# EAGLE board Armduino v14 (EAGLE 7.1.0)
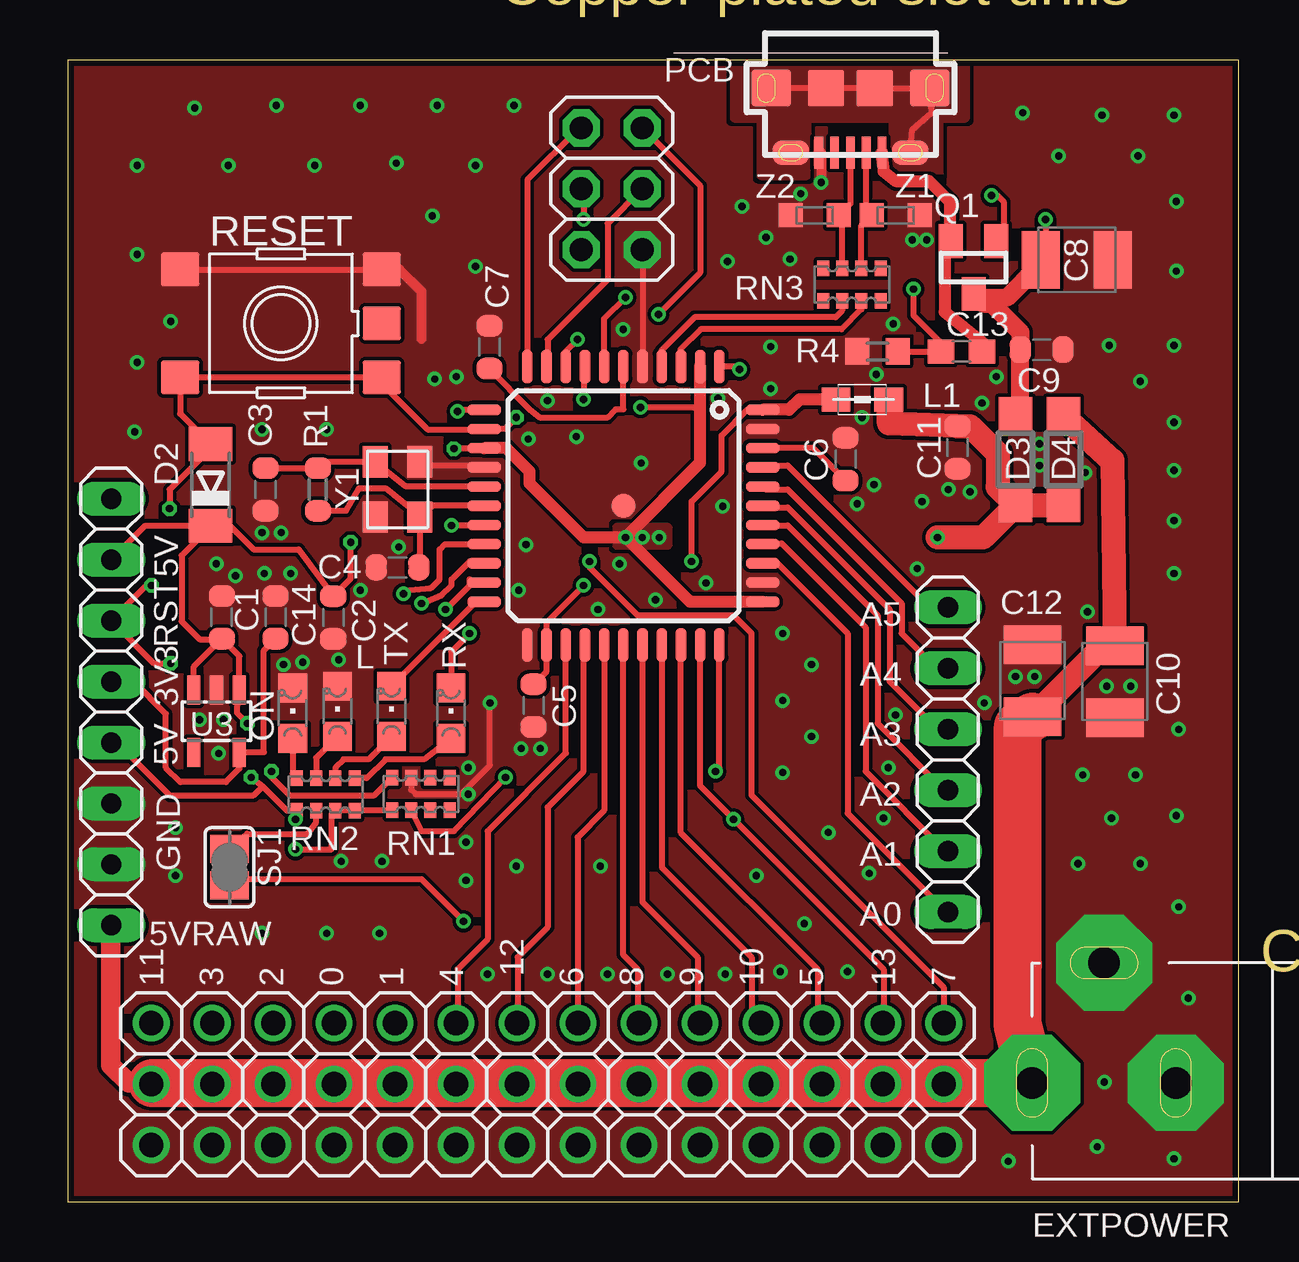
[diagram p0: board, top side]
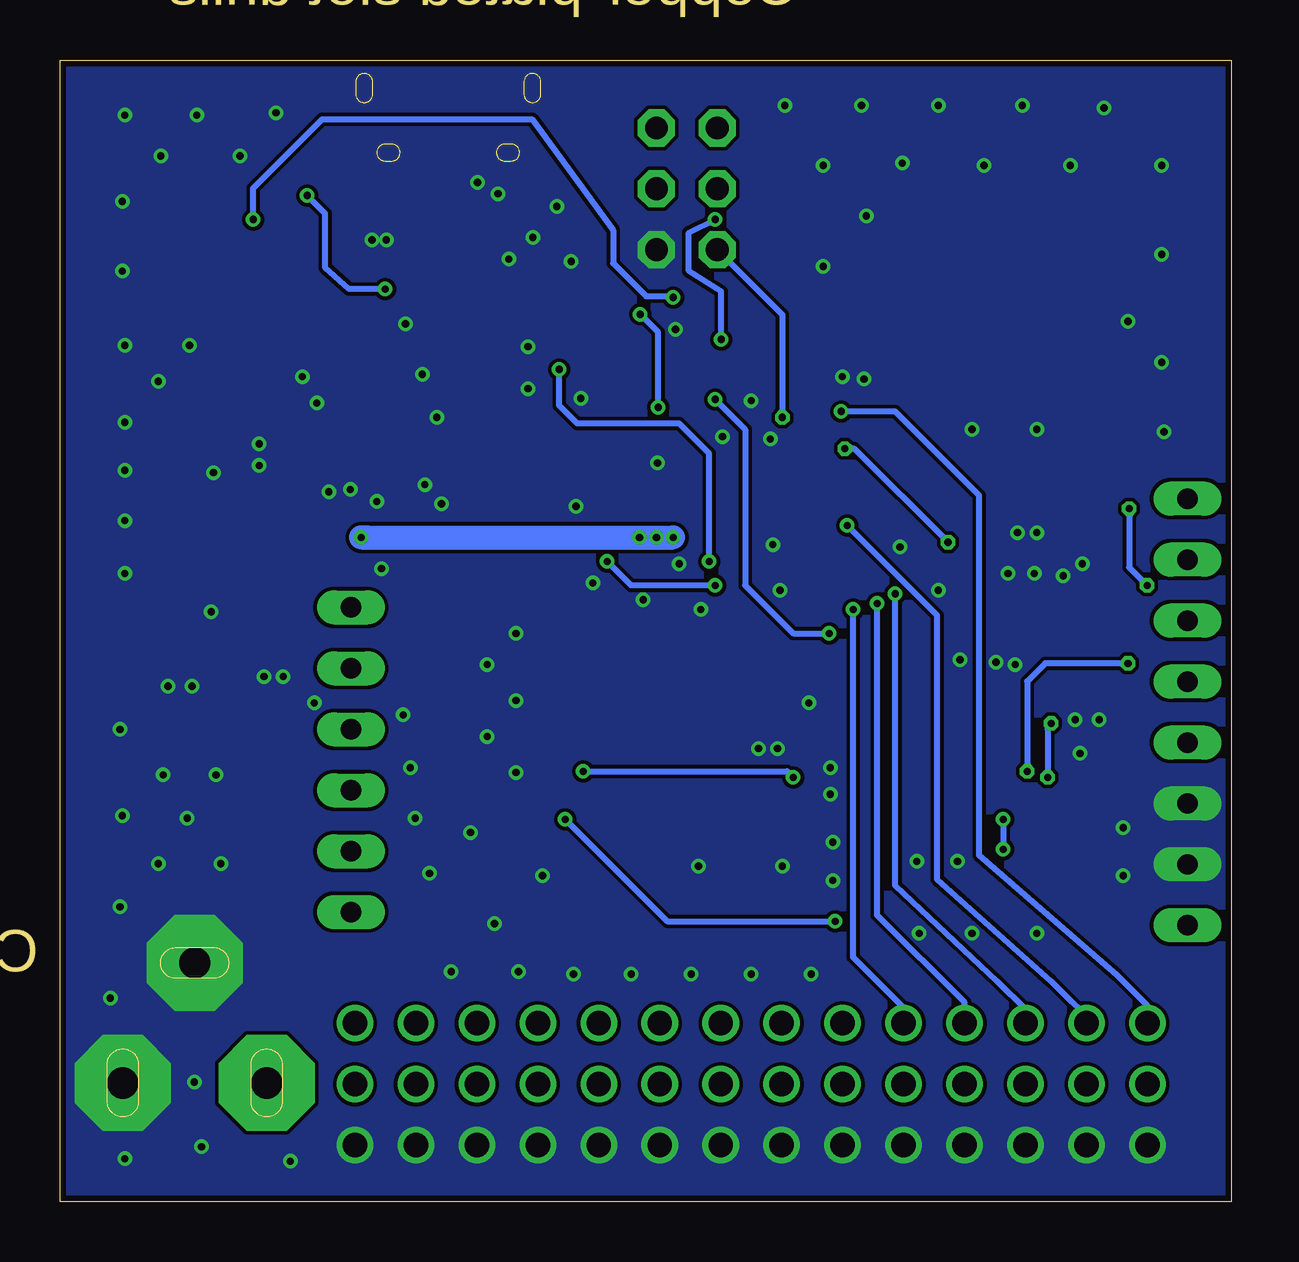
[diagram p1: board, bottom side, seen from below]

Size 48.8 x 47.6 mm. Coordinates in mm from the lower left corner, seen from the top.
Outline: 0,0 48.8,0 48.8,47.6 0,47.6 0,0
Copper layers (1*16): Top 0.035mm / dielectric 1.5mm / Bottom 0.035mm
Design rules "SeeedStudio_DRU_no_angle_2layer *": minimum track width 6mil, minimum drill 0.3mm, track to track 6mil, track to pad 6mil, pad to pad 6mil, via to via 6mil, smd to smd 0mil, copper to edge 10mil, drill to drill 10mil, minimum pad ring 10mil, minimum via ring 6mil, stop-mask expansion 2mil, vias tented up to drill 25mil, thermal gap 10mil
Net classes: 0 default: width 0.152 mm, drill 0.3 mm, clearance 0.152 mm; 1 power: width 0.152 mm, drill 0.3 mm, clearance 0.152 mm; 2 gnd: width 0.152 mm, drill 0.3 mm, clearance 0.152 mm; 3 usbvcc: width 0.152 mm, drill 0.3 mm, clearance 0.152 mm; 4 aref: width 0.152 mm, drill 0.3 mm, clearance 0.152 mm

## Footprints (pad centres in the part's own frame; a part is rotated, then mirrored left to right if it is on the bottom)
C0603-ROUND = smd 0.898 x 1.1: 1 -0.889,0; 2 0.889,0
SMC_B = smd 1.6 x 2.4: + -1.5,0; - 1.5,0
C0603 = smd 1.1 x 1: 1 -0.85,0; 2 0.85,0
MINIMELF = smd 1.4 x 1.8: A 1.7,0; C -1.7,0
SOD123 = smd 1.4 x 1.4: A 1.9,0; C -1.9,0
SMARTPRJ_POWERSUPPLY_DC-21MM = drill 1.3 pad 4 octagon: 1 -5.08,-3.353; 2 -0.076,-6.35; 3 -0.076,-0.356
2X03 = drill 0.95 pad 1.55 octagon: 1 -2.54,-1.27; 2 -2.54,1.27; 3 0,-1.27; 4 0,1.27; 5 2.54,-1.27; 6 2.54,1.27
SMARTPRJ_CON2_USB_MICRO_B_AT = smd 0.406 x 1.346: P1 -1.321,2.692; P2 -0.66,2.692; P3 0,2.692; P4 0.66,2.692; P5 1.321,2.692 | smd 1.651 x 1.549: S1 -3.302,0; S2 3.302,0 | smd 1.524 x 1.016: S3 -2.489,2.692; S4 2.489,2.692 | smd 1.524 x 1.524: S5 -1.016,0; S6 1.016,0
1X08 = drill 0.85 pad 1.422 long: 1 -8.89,0; 2 -6.35,0; 3 -3.81,0; 4 -1.27,0; 5 1.27,0; 6 3.81,0; 7 6.35,0; 8 8.89,0
1X06 = drill 0.85 pad 1.422 long: 1 -6.35,0; 2 -3.81,0; 3 -1.27,0; 4 1.27,0; 5 3.81,0; 6 6.35,0
1X14ROUND = drill 1.016: 1 -16.51,0; 2 -13.97,0; 3 -11.43,0; 4 -8.89,0; 5 -6.35,0; 6 -3.81,0; 7 -1.27,0; 8 1.27,0; 9 3.81,0; 10 6.35,0; 11 8.89,0; 12 11.43,0; 13 13.97,0; 14 16.51,0
CHIPLED_0805 = smd 1.2 x 1.2: A 0,-1.05; C 0,1.05
0805 = smd 1.2 x 1: 1 -1.1,0; 2 1.1,0
SUPER-SOT3 = smd 1 x 1.4: 1 -0.95,-1.1; 2 0.95,-1.1; 3 0,1.1
R0603-ROUND = smd 0.898 x 1.1: 1 -0.889,0; 2 0.889,0
R0603 = smd 1 x 1.1: 1 -0.85,0; 2 0.85,0
TS42 = smd 1.6 x 1.4: 1 -4.2,2.25; 2 4.2,2.25; 3 -4.2,-2.25; 4 4.2,-2.25; 5 -4.2,0
CAY16 = smd 0.5 x 0.65: 1 -1.2,-0.675; 2 -0.4,-0.675; 3 0.4,-0.675; 4 1.2,-0.675; 5 1.2,0.675; 6 0.4,0.675; 7 -0.4,0.675; 8 -1.2,0.675
SJ = smd 1.168 x 1.6: 1 -0.762,0; 2 0.762,0
TQFP44-PAD = smd 1.4 x 0.45: 1 -5.8,4; 2 -5.8,3.2; 3 -5.8,2.4; 4 -5.8,1.6; 5 -5.8,0.8; 6 -5.8,0; 7 -5.8,-0.8; 8 -5.8,-1.6; 9 -5.8,-2.4; 10 -5.8,-3.2; 11 -5.8,-4; 23 5.8,-4; 24 5.8,-3.2; 25 5.8,-2.4; 26 5.8,-1.6; 27 5.8,-0.8; 28 5.8,0; 29 5.8,0.8; 30 5.8,1.6; 31 5.8,2.4; 32 5.8,3.2; 33 5.8,4 | smd 0.45 x 1.4: 12 -4,-5.8; 13 -3.2,-5.8; 14 -2.4,-5.8; 15 -1.6,-5.8; 16 -0.8,-5.8; 17 0,-5.8; 18 0.8,-5.8; 19 1.6,-5.8; 20 2.4,-5.8; 21 3.2,-5.8; 22 4,-5.8; 34 4,5.8; 35 3.2,5.8; 36 2.4,5.8; 37 1.6,5.8; 38 0.8,5.8; 39 0,5.8; 40 -0.8,5.8; 41 -1.6,5.8; 42 -2.4,5.8; 43 -3.2,5.8; 44 -4,5.8 | smd 1 x 1: P$1 0,0
SOT23-DBV = smd 0.55 x 1.2: 1 -0.95,-1.3; 2 0,-1.3; 3 0.95,-1.3; 4 0.95,1.3; 5 -0.95,1.3
CRYSTAL-3.2-2.5 = smd 1.3 x 1.05: 1 -1.15,-0.925; 2 1.15,-0.925; 3 1.15,0.925; 4 -1.15,0.925
CT/CN0603 = smd 1 x 1: 1 -1,0; 2 1,0

## Placement (x,y rotation side)
C1  100n  [C0603-ROUND]  6.43,24.37 90 top
C2  100n  [C0603-ROUND]  11.07,24.36 270 top
C3  22p  [C0603-ROUND]  8.25,29.7 90 top
C4  22p  [C0603-ROUND]  13.75,26.45 180 top
C5  1uF  [C0603-ROUND]  19.42,20.69 270 top
C6  100n  [C0603-ROUND]  32.42,30.96 270 top
C7  1uF  [C0603-ROUND]  17.58,35.63 90 top
C8  10u  [SMC_B]  42.05,39.27 0 top
C9  100n  [C0603-ROUND]  40.59,35.53 180 top
C10  10u  [SMC_B]  43.64,21.69 270 top
C11  1u  [C0603-ROUND]  37.08,31.45 90 top
C12  10u  [SMC_B]  40.21,21.73 90 top
C13  100n  [C0603]  37.25,35.45 0 top
C14  1u  [C0603-ROUND]  8.67,24.37 270 top
D2  CD1206-S01575  [MINIMELF]  5.96,29.89 90 top
D3  [SOD123]  39.5,30.95 90 top
D4  [SOD123]  41.5,30.95 90 top
EXTPOWER  SMARTPRJ_POWERSUPPLY_DC21MMX  [SMARTPRJ_POWERSUPPLY_DC-21MM]  46.54,4.88 270 top
ICSP  ICSP  [2X03]  22.68,42.23 270 top
J1  USB MICRO  [SMARTPRJ_CON2_USB_MICRO_B_AT]  32.62,46.43 180 top
J3  8x1F-H8.5  [1X08]  1.82,20.42 270 top
J4  6x1F-H8.5  [1X06]  36.68,18.43 90 top
JP1  [1X14ROUND]  20,2.37 0 top
JP2  [1X14ROUND]  20,7.45 0 top
JP3  [1X14ROUND]  20,4.91 0 top
L  Yellow  [CHIPLED_0805]  11.25,20.45 0 top
L1  MH2029-300Y  [0805]  33.12,33.45 180 top
ON  Green  [CHIPLED_0805]  9.38,20.37 0 top
Q1  FDN360P  [SUPER-SOT3]  37.75,38.95 180 top
R1  1M  [R0603-ROUND]  10.43,29.7 90 top
R4  1k  [R0603]  33.75,35.45 0 top
RESET  TS42  [TS42]  8.89,36.62 180 top
RN1  10K  [CAY16]  14.72,17.01 180 top
RN2  1K  [CAY16]  10.76,16.99 0 top
RN3  22R  [CAY16]  32.68,38.24 0 top
RX  Yellow  [CHIPLED_0805]  15.98,20.37 0 top
SJ1  [SJ]  6.75,13.95 270 top
TX  Yellow  [CHIPLED_0805]  13.5,20.45 0 top
U2  ATMEGA32U4-XUAU  [TQFP44-PAD]  23.16,29.02 270 top
U3  LP2985-33DBVR  [SOT23-DBV]  6.21,20.04 180 top
Y1  16MHz KX-7  [CRYSTAL-3.2-2.5]  13.75,29.7 90 top
Z1  CG0603MLC-05E  [CT/CN0603]  31.12,41.12 180 top
Z2  CG0603MLC-05E  [CT/CN0603]  34.5,41.12 0 top

## Library data of the parts
C1-C7 C9 C11 C14 ICSP J3 J4 R1 RESET U2 U3 Y1 = SmartPrj
C8 C10 C12 C13 R4 = rcl
D2-D4 = diode
EXTPOWER J1 = Armduino_v1.3
JP1-JP3 = pinhead2
L ON RX TX = led
L1 = wuerth-elektronik
Q1 = transistor-power
RN1-RN3 = resistor-dil
SJ1 = jumper
Z1 Z2 = varistor

## Nets
5-GND: RESET.5
+3V3: C14.2 J3.4 U3.5
+5V [usbvcc]: C1.1 C2.1 C11.2 D2.C D3.C D4.C ICSP.2 J3.2 J3.5 L1.1 RN1.5 RN2.1 RN2.3 RN2.4 U2.2 U2.14 U2.34 U3.1 U3.3
+5VRAW [usbvcc]: C10.+ C12.+ D4.A EXTPOWER.2 J3.8 JP3.1 JP3.2 JP3.3 JP3.4 JP3.5 JP3.6 JP3.7 JP3.8 JP3.9 JP3.10 JP3.11 JP3.12 JP3.13 JP3.14
A0: J4.1 U2.36
A1: J4.2 U2.37
A2: J4.3 U2.38
A3: J4.4 U2.39
A4: J4.5 U2.40
A5: J4.6 U2.41
AREF [aref]: C6.2 U2.42
AVCC: C5.1 L1.2 U2.24 U2.44
D0/RX: JP2.4 U2.20
D1/TX: JP2.5 U2.21
D2/SDA: JP2.3 U2.19
D3/SCL: JP2.2 U2.18
D4: JP2.6 U2.25
D5*: JP2.12 U2.31
D6*: JP2.8 U2.27
D7: JP2.14 U2.1
D+: J1.P3 RN3.7 Z1.1
D-: J1.P2 RN3.6 Z2.1
GND [gnd]: C1.2 C2.2 C3.1 C4.2 C5.2 C6.1 C7.2 C8.- C9.1 C10.- C11.1 C12.- C14.1 EXTPOWER.1 EXTPOWER.3 ICSP.6 J1.P5 J3.6 J3.7 JP1.1 JP1.2 JP1.3 JP1.4 JP1.5 JP1.6 JP1.7 JP1.8 JP1.9 JP1.10 JP1.11 JP1.12 JP1.13 JP1.14 L.C ON.C R4.1 RESET.3 RESET.4 RN1.3 U2.5 U2.15 U2.23 U2.35 U2.43 U2.P$1 U3.2 Y1.2 Y1.4 Z1.2 Z2.2
HWB: RN1.6 U2.33
IO8: JP2.9 U2.28
IO9*: JP2.10 U2.29
IO10*: JP2.11 U2.30
IO11*: JP2.1 U2.12
IO12: JP2.7 U2.26
IO13*: JP2.13 SJ1.2 U2.32
LL: RN2.2 SJ1.1
MISO: ICSP.1 U2.11
MOSI: ICSP.4 U2.10
N$1: C13.1 Q1.1 R4.2
N$2: L.A RN2.7
N$3: ON.A RN2.8
N$5 [gnd]: J1.S1 J1.S2 J1.S3 J1.S4 J1.S5 J1.S6
N$6: RN2.6 TX.A
N$8: RN2.5 RX.A
RD+: RN3.2 U2.4
RD-: RN3.3 U2.3
RESET: D2.A ICSP.5 J3.3 RESET.1 RESET.2 RN1.4 U2.13
RXLED: RX.C U2.8
SCK: ICSP.3 U2.9
TXLED: TX.C U2.22
UCAP: C7.1 U2.6
USBID: J1.P4
VUSB: C8.+ C9.2 D3.A Q1.3 U2.7
VUSBRAW: C13.2 J1.P1 Q1.2
XTAL1: C4.1 R1.1 U2.17 Y1.1
XTAL2: C3.2 R1.2 U2.16 Y1.3

## Tracks (layer width: path | path; a pad name or v marks a point on that pad's centre or on a via)
+3V3
  Top 0.25: C14.2 8.18,22.99 8.18,18.74 U3.5 7.16,18.06 6.6,17.5 4.7,17.5 4.1,18.1 4.1,20.35 2.76,21.69 J3.4
+5V  (via drill 0.3)
  Top 0.25: C1.1 7.16,22.75 U3.1 7.06,20.61 7.06,20.39 v7.5,19.95 | ICSP.2 26.36,42.36 26.36,38.73 v24.62,37 | RN1.5 13.5,16.32 RN2.4 12,16.36 12,16.45 11.87,16.32 RN2.3 11,16.16 11,14.7 v9.5,14.7 | U3.3 5.26,21.69 | 5.26,21.69 5.25,21.7 | v9.5,15.95 9.56,16.01 RN2.1 9.13,16.32 8.12,17.32 | C1.1 6.4,23.45 5.5,23.45 4.75,24.2 4.75,26.95 5.96,28.16 D2.C | D2.C 6.76,28.19 7.75,27.2 9.62,27.2 9.63,27.19 C2.1 11.8,25.98 v11.8,27.5 | v7.65,17.7 8.12,17.32 | J3.2 3.24,28.19 D2.C | J3.5 2.05,19.15 4.25,16.95 7.75,16.95 8.12,17.32 | v16.1,31.4 16.12,31.42 U2.14 | 5.26,21.69 5.26,22.31 C1.1 | v23.88,33.12 26.11,33.12 26.36,32.88
  Top 0.5: v23.25,27.7 25.93,25.02 U2.34 | v23.25,27.7 26.36,30.81 26.36,32.88 U2.2 | v23.25,27.7 21.5,27.7 19.25,29.95 19.25,30.45 18.28,31.42 U2.14
  Top 1: D3.C D4.C | L1.1 34.22,32.45 C11.2 37.61,32.34 38.75,31.2 38.75,29.8 D3.C | D3.C 38.15,27.7 v36.25,27.7
  Bottom 0.25: v9.5,15.95 v9.5,14.7 | v7.5,19.95 7.65,19.7 v7.65,17.7 | v11.8,27.5 15.7,31.4 v16.1,31.4 | v23.88,33.12 23.88,36.25 v24.62,37
  Bottom 1: v23.25,27.7 v36.25,27.7 36,27.7
  other vias: 23.95,27.7 24.65,27.7
  pour Top (no thermals): 22.9,28.1 22.9,27.4 25,27.4 25,28 25,28.1
+5VRAW
  Top 0.25: 41.5,32.75 D4.A
  Top 0.406: 6.03,4.96 4,4.96 4,4.91 JP3.1 | 9,4.91 9,4.96 | 11.9,4.91 11.9,4.96 | 24,4.91 24,4.96 | 28.4,4.91 28.4,4.96 28.89,4.96 JP3.11 | JP3.6 JP3.7 | JP3.7 16,4.91 16,4.4 13.65,4.4 JP3.5 | JP3.7 19.1,4.91 19.1,4.6 23.1,4.6 23.1,5 23.2,5 23.2,4.91 | JP3.8 23.2,4.9 23.2,4.91 | JP3.10 JP3.9 23.75,4.91 | JP3.11 JP3.12 JP3.13 | JP3.14 JP3.11 | 23.75,4.91 23.75,4.96 | JP3.4 11.5,4.91 11.5,4.96 | JP3.3 8.62,4.91 8.62,4.96 | JP3.2 6.12,4.91 6.12,4.96 | 23.75,4.91 23.2,4.91
  Top 0.75: D4.A 41.6,32.95
  Top 0.813: 3.54,4.96 2.54,4.96 1.8,5.7 1.8,11.51 J3.8
  Top 1: C12.+ 43.17,23.19 C10.+ 43.54,30.91 41.5,32.75
  Top 2: 3.54,4.96 4,4.96 6.12,4.96 8.62,4.96 9,4.96 11.5,4.96 11.9,4.96 23.75,4.96 24,4.96 28.4,4.96 EXTPOWER.2 39.59,7.41 39.6,9.9 39.6,19.82 C12.+
A0
  Top 0.25: U2.36 29.33,26.62 29.25,26.7 29.5,26.7 32.5,23.7 32.5,16.2 36.62,12.08 J4.1
A1
  Top 0.25: U2.37 28.93,27.45 29.75,27.45 33.25,23.95 33.25,17.95 36.58,14.62 J4.2
A2
  Top 0.25: U2.38 28.98,28.2 30,28.2 33.75,24.45 33.75,19.95 36.54,17.16 J4.3
A3
  Top 0.25: U2.39 29.03,28.95 30,28.95 34.25,24.7 34.25,21.7 36.25,19.7 J4.4
A4
  Top 0.25: U2.40 29.08,29.7 30,29.7 34.75,24.95 34.75,23.7 36.21,22.24 J4.5
A5
  Top 0.25: U2.41 28.88,30.7 30,30.7 35.92,24.78 J4.6
AREF
  Top 0.25: C6.2 31.07,31.42 U2.42
AVCC  (via drill 0.3)
  Top 0.25: U2.24 19.92,23.18 | U2.24 19.96,24.16 v21.5,25.7 | v26,26.7 26,29.2 27.25,30.45 27.25,31.95 28.32,33.02 U2.44 | C5.1 19.96,22.12 U2.24
  Top 0.5: L1.2 30.5,33.45 30.07,33.02 U2.44
  Bottom 0.25: v21.5,25.7 25,25.7 v26,26.7
D0/RX  (via drill 0.3)
  Top 0.25: U2.20 16.83,26.62 16.75,26.7 16,25.95 16,25.7 15.6,25.3 14.9,25 v14.75,24.95
  Bottom 0.25: v14.75,24.95 14.75,11.95 11.11,8.31 JP2.4
D1/TX  (via drill 0.3)
  Top 0.25: v15.75,24.7 16.75,25.7 16.75,25.95 U2.21
  Bottom 0.25: v15.75,24.7 15.75,10.2 13.65,8.1 JP2.5
D2/SDA  (via drill 0.3)
  Top 0.25: U2.19 15.72,27.42 15.5,27.2 15.5,25.95 15.15,25.6 14.25,25.5 v14,25.35
  Bottom 0.25: v14,25.35 14,13.2 9.75,9.2 8.57,8.02 JP2.3
D3/SCL  (via drill 0.3)
  Top 0.25: v16,28.2 16.02,28.22 U2.18
  Bottom 0.25: v16,28.2 12.25,24.45 12.25,13.45 7.5,9.2 6.65,8.35 6.3,8 6.03,7.73 JP2.2
D4
  Top 0.25: U2.25 20.76,18.71 17.5,15.45 17.5,10.95 16.25,9.7 16.25,7.51 JP2.6
D5*
  Top 0.25: U2.31 25.56,15.39 31.25,9.7 31.25,7.63 JP2.12
D6*
  Top 0.25: U2.27 22.36,16.31 21.25,15.2 21.25,7.47 JP2.8
D7  (via drill 0.3)
  Top 0.25: v21.75,26.7 21.75,26.45 23.75,24.45 27.75,24.45 28.5,23.7 28.5,16.95 36.5,8.95 JP2.14 | v28,34.7 27.88,34.82 U2.1
  Bottom 0.25: v21.75,26.7 21.75,31.2 23,32.45 27.25,32.45 28,33.2 v28,34.7
D+
  Top 0.25: Z1.1 32,41.3 | J1.P3 32.62,41.62 Z1.1 | RN3.7 32.28,40.97 Z1.1
D-
  Top 0.25: J1.P2 33.25,43.71 33.25,41.38 Z2.1 33.08,40.7 RN3.6
GND  (via drill 0.3)
  Top 0.25: 24,34.86 U2.5 ICSP.6 | RESET.4 RESET.3 | 6.32,21.2 U3.2 | 15,30.7 14.85,30.85 Y1.2 14.82,30.7 17.28,30.7 U2.15 | RN1.3 14.32,17.18 14.5,17 16.4,17 17.6,18.2 v17.6,20.8 | C7.2 17.5,36.44 | 28.98,32.2 U2.43
  Top 0.406: 14.75,35.97 14.75,37.95 13.83,38.87 RESET.3 | J1.P5 31.4,43.74 v31.4,42.5
  other vias: 44.5,17.8 42.3,17.8 43.5,16 46.2,16.1 44.7,14.1 42.1,14.1 46.3,12.3 46.7,8.5 43.2,5 46.1,1.8 42.9,2.3 39.2,1.7 46.3,19.7 46.1,26.2 46.1,28.4 46.1,30.5 46.1,32.5 44.7,34.2 46.1,35.7 43.4,35.7 46.2,38.8 46.2,41.7 44.6,43.6 41.3,43.6 30.1,39.3 29.1,40.2 30.55,42.02 28.1,41.5 27.5,39.2 17,39 15.2,41.1 17,43.2 13.7,43.3 10.3,43.2 6.7,43.2 2.9,43.2 2.9,39.5 4.3,36.7 2.9,35 2.8,32.1 8.1,32.2 10.8,32.2 6.2,26.6 5.3,45.6 8.7,45.7 12.2,45.7 15.4,45.7 18.6,45.7 39.8,45.4 21.2,31.9 23.9,30.8 19.1,27.4 27.3,29 29.8,23.7 31,22.4 29.8,20.9 31,19.4 29.8,17.9 4.5,15.6 4.5,13.6 17.5,9.5 20,9.5 22.5,9.5 25,9.5 27.4,9.5 29.7,9.6 32.5,9.6 18.7,14 22.2,14 8.1,11.2 10.8,11.2 13,11.2 31.7,15.4 33.4,13.7 28.7,13.6 30.7,11.6 43.1,45.3 46.1,45.3 35.2,40.1 35.8,40.1 6.5,20.1 5.5,20.1 6.3,18.7 13.8,27.3 12.2,25.5 40.5,31.6 40.5,30.7 42.4,30.4 42.5,24.6 43.3,21.5 44.3,21.5 39.5,21.9 40.3,21.9 38.2,20.8 35.4,26.4 32.9,29.1 33.6,29.9 35.6,29.2 36.7,29.7 37.6,29.6 33.1,32.7 38.1,33.3 38.7,34.4 33.7,34.5 27.1,33.5 29.3,33.9 23.15,36.38 9,22.4 9.8,22.5 11.3,22.6 16.7,17 16.7,18.1 9.3,26.2 8.2,26.2 7,26.1 8.1,27.9 8.9,27.9 15.3,34.3 16.2,34.4 34,16 34.2,18.1 34.5,20.3 16.6,15 11.4,14.2 13.1,14.2 16.6,13.4 19.7,18.9 18.9,18.9 19.2,31.8 20,33.4 26.6,25.8 18.8,25.5 34.4,36.6 22.1,24.7 24.5,25.1 23,26.6 29.3,35.65
  pour Top (rank 2, no thermals): -1.5,48.6 49.5,48.6 49.5,-0.8 -1.7,-2.3 -1.7,47.1
  pour Bottom (no thermals): -1,48.7 49.6,48.7 49.6,-1.6 -0.9,-1.6
HWB  (via drill 0.3)
  Top 0.25: v18.25,17.7 16.1,15.45 14.76,15.45 RN1.6 | v27,17.95 27.16,18.11 U2.33
  Bottom 0.25: v27,17.95 18.5,17.95 v18.25,17.7
IO8
  Top 0.25: U2.28 23.16,10.29 23.75,9.7 23.75,7.51 JP2.9
IO9*
  Top 0.25: U2.29 23.96,12.49 26.25,10.2 26.25,7.55 JP2.10
IO10*
  Top 0.25: U2.30 24.76,13.94 28.5,10.2 28.5,7.84 JP2.11
IO11*  (via drill 0.3)
  Top 0.25: v16.25,32.95 16.32,33.02 U2.12
  Bottom 0.25: v16.25,32.95 14,32.95 10.5,29.45 10.5,14.45 4.75,9.45 3.5,8.2 JP2.1
IO12
  Top 0.25: JP2.7 18.75,7.47 18.75,10.2 20,11.45 20,16.45 21.5,17.95 21.5,22.7 21.56,22.76 U2.26
IO13*  (via drill 0.3)
  Top 0.25: U2.32 26.36,17.34 v27.75,15.95 27.62,15.82 27.88,15.82 34,9.7 34,7.78 JP2.13 | v16.5,11.7 14.75,13.45 6.75,13.45
  Top 0.406: 6.75,13.45 SJ1.2
  Bottom 0.25: v27.75,15.95 23.5,11.7 v16.5,11.7
LL
  Top 0.25: RN2.2 10.36,15.81 10,15.35 7.49,15.35 SJ1.1
MISO
  Top 0.25: ICSP.1 21.34,44.7 21.25,44.7 19.16,42.61 U2.11
MOSI
  Top 0.25: ICSP.4 22.5,40.78 22.5,38.45 20,35.95 20,35.45 19.96,35.41 U2.10
N$1  (via drill 0.3)
  Top 0.25: R4.2 C13.1 36.4,35.8 35.25,36.95 v35.25,38.05 | v38.5,41.95 38.75,41.95 39,41.7 39,40.35 Q1.1
  Bottom 0.25: v35.25,38.05 36.75,38.05 37.75,38.95 37.75,41.2 v38.5,41.95
N$2
  Top 0.25: L.A 10.36,18.51 RN2.7
N$3
  Top 0.25: ON.A 9.38,17.84 RN2.8
N$5
  Top 0.25: J1.S3 35.2,44.7 36,45.4 | 36,45.4 J1.S1 | 36,45.4 36,46.2 35.9,46.3 35.9,46.4 33.67,46.4 J1.S5 J1.S6 J1.S2
  pour Top (no thermals): 27.8,47.9 27.8,45.2 28.9,45.2 28.9,42.8 30.8,42.8 30.8,45.2 34.4,45.2 34.4,42.9 36.3,42.9 36.3,45.2 37.4,45.2 37.4,47.7 29.1,47.7 28.6,48.2 28.6,48.1
N$6
  Top 0.25: TX.A 12.55,18.45 11.5,18.45 11.16,18.11 RN2.6
N$8
  Top 0.25: RX.A 14.86,18.45 13.25,18.45 12.46,17.66 RN2.5
RD+
  Top 0.25: RN3.2 32.28,37.16 32,36.88 26.12,36.88 25.06,35.81 24.88,35.62 24.76,35.51 U2.4
RD-
  Top 0.25: RN3.3 33.08,37.2 32.25,36.38 26.38,36.38 25.56,35.56 U2.3
RESET  (via drill 0.3)
  Top 0.25: v4.3,22.45 3.6,22.45 J3.3 3.29,25.7 v3.5,25.7 | v8.5,17.95 8.5,17.7 9.25,16.95 12.79,16.95 RN1.4 | v4.25,28.9 4.25,29.7 5.96,31.41 D2.A 4.69,32.86 RESET.2 RESET.1 13.09,34.11 15,32.2 17.34,32.2 U2.13 18.22,32.22 v18.7,32.7
  Bottom 0.25: v4.3,22.45 7.75,22.45 8.5,21.7 v8.5,17.95 | v4.25,28.9 4.25,26.45 v3.5,25.7 | ICSP.5 18.7,36.98 v18.7,32.7
RXLED  (via drill 0.3)
  Top 0.25: U2.8 21.5,34.76 v21.5,33.45 | v16.75,23.7 15.98,22.93 RX.C
  Bottom 0.25: v21.5,33.45 20.25,32.2 20.25,25.7 18.25,23.7 v16.75,23.7
SCK  (via drill 0.3)
  Top 0.25: ICSP.3 21.5,42.14 v21.5,40.95 | v21.25,35.95 20.76,35.46 U2.9
  Bottom 0.25: v21.25,35.95 21.25,37.95 22.6,38.8 22.6,40.4 v21.5,40.95
TXLED
  Top 0.25: U2.22 17.02,25.02 TX.C
UCAP
  Top 0.25: C7.1 19.23,33.05 19.68,32.7 22.5,32.7 22.84,33.04 23.16,33.04 U2.6
VUSB  (via drill 0.3)
  Top 0.25: 39.7,35.9 C9.2 39.5,35.33 | U2.7 22.36,36.81 v23.25,37.7 | v40.75,40.95 40.75,38.2 40.42,39.01 | 40.42,39.01 40.4,39.05 | 40.45,39 40.42,39 40.42,39.01
  Top 0.75: D3.A 39.7,33.05 C9.2 39.7,36.25 38.5,37.45 38.15,37.45 Q1.3 37.9,37.7 39.15,37.7 40.45,39 C8.+
  Bottom 0.25: v40.75,40.95 40.75,42.25 37.88,45.12 29.12,45.12 25.75,40.5 25.75,39.12 24.38,37.75 23.3,37.75 v23.25,37.7
VUSBRAW
  Top 0.25: Q1.2 36.8,40.4 36.75,40.45
  Top 0.5: 36.75,40.45 36.75,41.7 35.9,42.55 34.5,42.55 34,42.95 33.9,43.68 J1.P1 | Q1.2 36.55,40 36.55,37.1 38.1,35.85 C13.2
XTAL1
  Top 0.25: U2.17 15.22,29.02 Y1.1 | R1.1 11.61,28.81 12.15,29.75 13.25,29.75 14.25,28.95 14.65,28.55 Y1.1 | Y1.1 14.68,26.99 C4.1
XTAL2
  Top 0.25: U2.16 14.1,29.82 Y1.3 10.69,30.85 R1.2 C3.2

## Text on the board
tNames: 5V | A5 | 3V3 | RST | A4 | A3 | 5V | A2 | GND | A1 | 5VRAW | A0 | 12 | 11 | 3 | 2 | 0 | 1 | 4 | 6 | 8 | 9 | 10 | 5 | 13 | 7
Milling: Copper-plated slot drills | Copper-plated slot drills